# EAGLE board AccelAdapter (EAGLE 6.4)
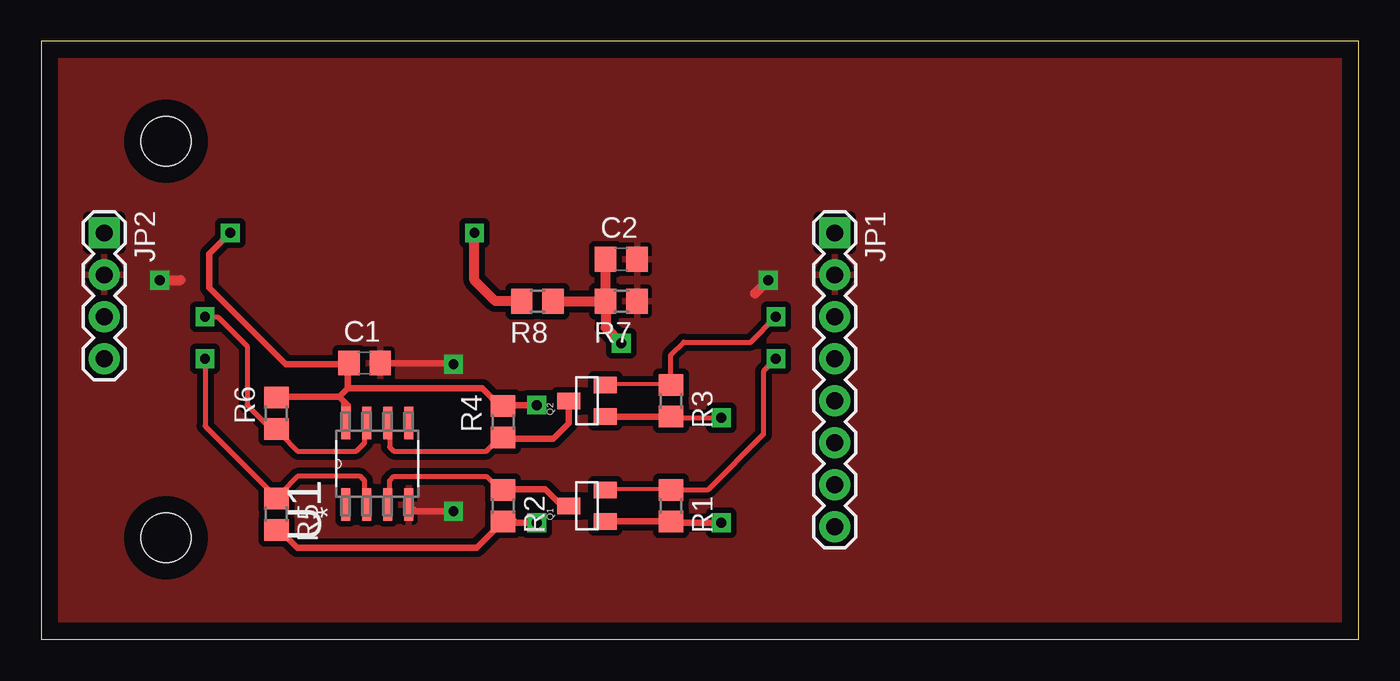
[diagram p0: board, top side]
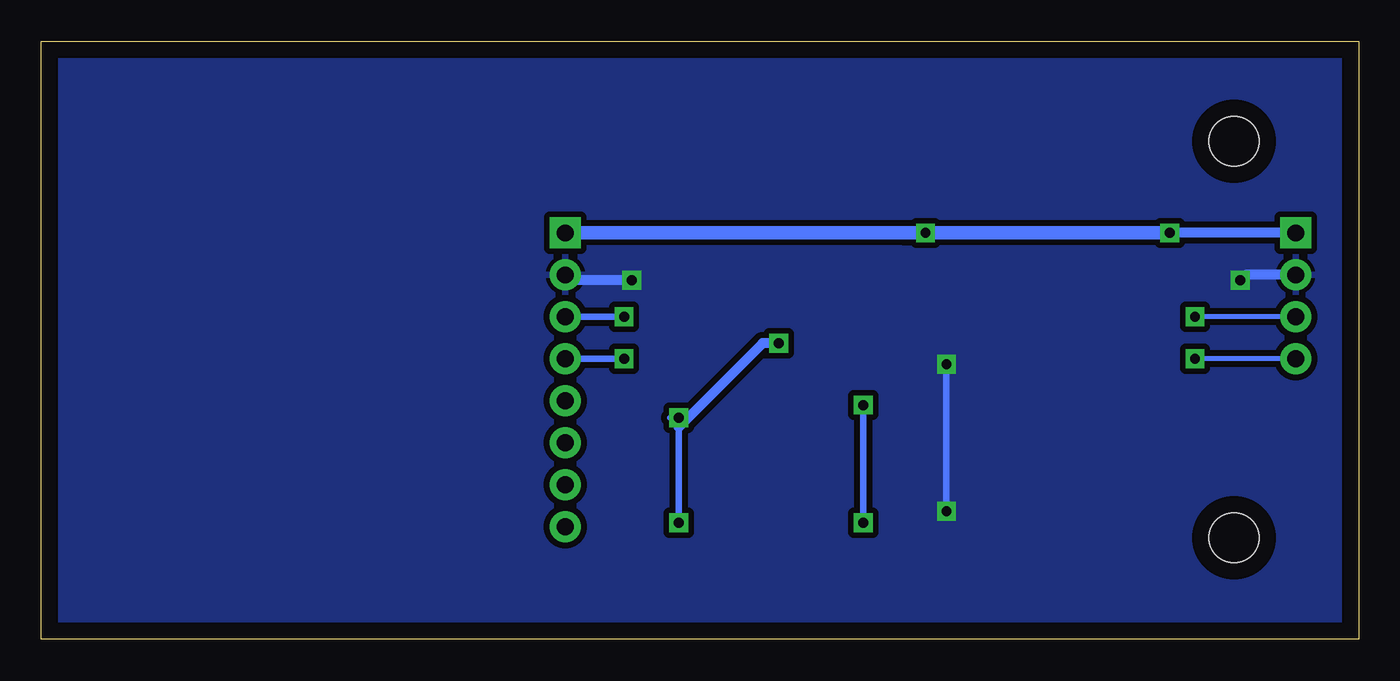
[diagram p1: board, bottom side, seen from below]

Size 79.71 x 36.18 mm. Coordinates in mm from the lower left corner, seen from the top.
Outline: 0,0 79.71,0 79.71,36.18 0,36.18 0,0
Copper layers (1*16): Top 0.035mm / dielectric 1.5mm / Bottom 0.035mm
Design rules "default *": minimum track width 10mil, minimum drill 24mil, track to track 8mil, track to pad 8mil, pad to pad 8mil, via to via 8mil, smd to smd 8mil, copper to edge 40mil, drill to drill 8mil, minimum pad ring 10mil, minimum via ring 8mil, stop-mask expansion 4mil, vias tented up to drill 0mil, thermal gap 10mil
Net classes: 0 default: clearance 0.355 mm
Holes 3 mm at 7.54,30.14 7.54,6.14

## Footprints (pad centres in the part's own frame; a part is rotated, then mirrored left to right if it is on the bottom)
C0805 = smd 1.3 x 1.5: 1 -0.95,0; 2 0.95,0
1X08 = drill 1.016 pad 1.88 square: 1 0,0 | drill 1.016 pad 1.88: 2 2.54,0; 3 5.08,0; 4 7.62,0; 5 10.16,0; 6 12.7,0; 7 15.24,0; 8 17.78,0
1X04 = drill 1.016 pad 1.88 square: 1 0,0 | drill 1.016 pad 1.88: 2 2.54,0; 3 5.08,0; 4 7.62,0
SOT23 = smd 1 x 1.4: 1 -0.95,-1.1; 2 0.95,-1.1; 3 0,1.1
R0805 = smd 1.3 x 1.5: 1 -0.95,0; 2 0.95,0
SOIC127P600X175-8N = smd 1.981 x 0.559: 1 -2.464,1.905; 2 -2.464,0.635; 3 -2.464,-0.635; 4 -2.464,-1.905; 5 2.464,-1.905; 6 2.464,-0.635; 7 2.464,0.635; 8 2.464,1.905

## Placement (x,y rotation side)
C1  .1uF  [C0805]  19.56,16.72 0 top
C2  .1uF  [C0805]  35.1,23 0 top
JP1  Accel  [1X08]  48.01,24.59 270 top
JP2  I2CExt  [1X04]  3.81,24.59 270 top
Q1  MOSFET-NCHANNELBSS138  [SOT23]  33.02,8.08 90 top
Q2  MOSFET-NCHANNELBSS138  [SOT23]  33.02,14.43 90 top
R1  10k  [R0805]  38.1,8.08 270 top
R2  10k  [R0805]  27.94,8.08 270 top
R3  10k  [R0805]  38.1,14.43 270 top
R4  10k  [R0805]  27.94,13.16 90 top
R5  470R  [R0805]  14.22,7.57 270 top
R6  470R  [R0805]  14.22,13.67 90 top
R7  330R  [R0805]  35.1,20.46 180 top
R8  169R  [R0805]  30.02,20.46 180 top
U1  P82B715D  [SOIC127P600X175-8N]  20.32,10.62 90 top

## Library data of the parts
C1 C2 = rcl; MPN: MCCA000386; OC_NEWARK: 33R0609
JP1 JP2 = SparkFun-Connectors; OC_NEWARK: unknown
Q1 Q2 = SparkFun-DiscreteSemi; OC_NEWARK: unknown; PROD_ID: TRANS-00830
R1-R4 = rcl; MPN: RC0805JR-1310KL; OC_NEWARK: 68R0287
R5-R8 = rcl; MPN: RC0805JR-07470RL; OC_NEWARK: 66R3683
U1 = Texas Instruments_By_element14_Batch_1; MPN: P82B715D; OC_FARNELL: 1604945; OC_NEWARK: 84M9793; PACKAGE: SOIC-8; SUPPLIER: Texas Instruments

## Nets
+3V3: C2.1 Q1.1 Q2.1 R1.2 R3.2 R7.2 R8.1
+5V: C1.1 JP1.1 JP2.1 R2.2 R4.2 R5.2 R6.2 R8.2 U1.8
GND: C1.2 C2.2 JP1.2 JP2.2 R7.1 U1.4
HSCL: Q2.3 R4.1 U1.6
HSDA: Q1.3 R2.1 U1.3
LCL: JP2.3 R6.1 U1.7
LDA: JP2.4 R5.1 U1.2
SCL: JP1.3 Q2.2 R3.1
SDA: JP1.4 Q1.2 R1.1

## Tracks (layer width: path | path; a pad name or v marks a point on that pad's centre or on a via)
+3V3  (via drill 0.6)
  Top 0.305: R3.2 38.17,13.41 v41.15,13.41
  Top 0.406: Q2.1 R3.2 | Q1.1 R1.2 38.17,7.06 v41.15,7.06 | v41.15,13.41 41.08,13.48
  Top 0.61: R8.1 R7.2 | R7.2 C2.1 | R7.2 34.15,18.87 v35.1,17.92
  Bottom 0.406: v41.15,7.06 41.15,12.84 v41.15,13.41 41.66,13.41
  Bottom 0.61: v35.1,17.92 36.07,17.92 41.15,12.84
+5V  (via drill 0.6)
  Top 0.305: U1.8 18.29,13.21 18.29,14.43 18.1,14.62 | 18.1,14.62 R6.2 | 18.54,15.19 18.1,14.75 18.1,14.62
  Top 0.406: 18.54,16.65 18.54,15.19 | 18.54,15.19 18.03,14.68 | 14.48,14.68 18.03,14.68 | 18.03,14.68 18.54,14.18 18.54,13.16 | 18.54,15.19 26.67,15.19 27.75,14.11 R4.2 28.01,14.18 v29.97,14.18 | R5.2 14.41,6.62 15.49,5.54 26.35,5.54 R2.2 28.64,7.13 28.7,7.06 v29.97,7.06 | v11.43,24.59 10.16,23.32 10.16,21.27 14.78,16.65 18.54,16.65 | 18.54,16.65 C1.1
  Top 0.61: R8.2 27.48,20.46 26.21,21.73 v26.21,24.59
  Bottom 0.406: v29.97,14.18 v29.97,7.06
  Bottom 0.61: JP2.1 v11.43,24.59
  Bottom 0.813: v11.43,24.59 v26.21,24.59 27.48,24.59 JP1.1
GND  (via drill 0.6)
  Top 0.406: C1.2 24.87,16.72 v24.94,16.65 | v24.94,7.76 22.62,7.76 U1.4
  Top 0.61: 43.18,20.92 v43.99,21.73 | v7.16,21.73 8.43,21.73
  Bottom 0.406: v24.94,16.65 v24.94,7.76
  Bottom 0.61: v43.99,21.73 47.69,21.73 JP1.2 | JP2.2 6.84,22.05 v7.16,21.73
  pour Top: -0.46,36.14 79.48,36.14 79.48,0.14 -0.46,0.14
  pour Bottom: -0.46,36.14 79.48,36.14 79.48,0.14 -0.46,0.14
HSCL
  Top 0.305: U1.6 21.08,12.96 21.08,11.64 21.34,11.38 26.92,11.38 27.75,12.21 R4.1
  Top 0.406: Q2.3 31.92,13.08 30.99,12.14 28.01,12.14 R4.1
HSDA
  Top 0.305: U1.3 21.08,8.28 21.08,9.6 21.34,9.86 26.92,9.86 27.75,9.03 R2.1
  Top 0.406: Q1.3 31.5,8.08 30.48,9.1 28.01,9.1 R2.1
LCL  (via drill 0.6)
  Top 0.305: v9.91,19.51 10.67,19.51 12.45,17.73 12.45,14.18 13.9,12.72 | 14.22,12.65 14.48,12.65 | 14.48,12.65 14.48,12.4 15.49,11.38 19.05,11.38 19.56,11.89 19.56,12.96 U1.7 | R6.1 14.41,12.72 14.48,12.65
  Top 0.61: 19.68,12.72 U1.7 | 13.9,12.72 R6.1 14.48,12.72
  Bottom 0.305: JP2.3 v9.91,19.51
LDA  (via drill 0.6)
  Top 0.254: 14.48,8.84 R5.1
  Top 0.305: U1.2 19.56,8.28 19.56,9.6 19.3,9.86 15.49,9.86 14.48,8.84 14.22,8.59 | v9.91,16.97 9.91,12.91 14.22,8.59 | 14.22,8.59 R5.1
  Bottom 0.305: JP2.4 v9.91,16.97
SCL  (via drill 0.6)
  Top 0.254: Q2.2 34.29,15.45 38.1,15.45 R3.1
  Top 0.305: 38.1,15.45 38.1,17.22 38.86,17.99 42.93,17.99 v44.45,19.51
  Bottom 0.406: v44.45,19.51 JP1.3
SDA  (via drill 0.6)
  Top 0.254: Q1.2 34.29,9.1 38.1,9.1 R1.1
  Top 0.305: 38.1,9.1 38.35,9.35 | v44.45,16.97 43.69,16.21 43.69,12.4 40.32,9.03 R1.1
  Bottom 0.406: v44.45,16.97 JP1.4